# EAGLE board weather-bit-Panel_v12 (EAGLE 9.5.2), part 1 of 2
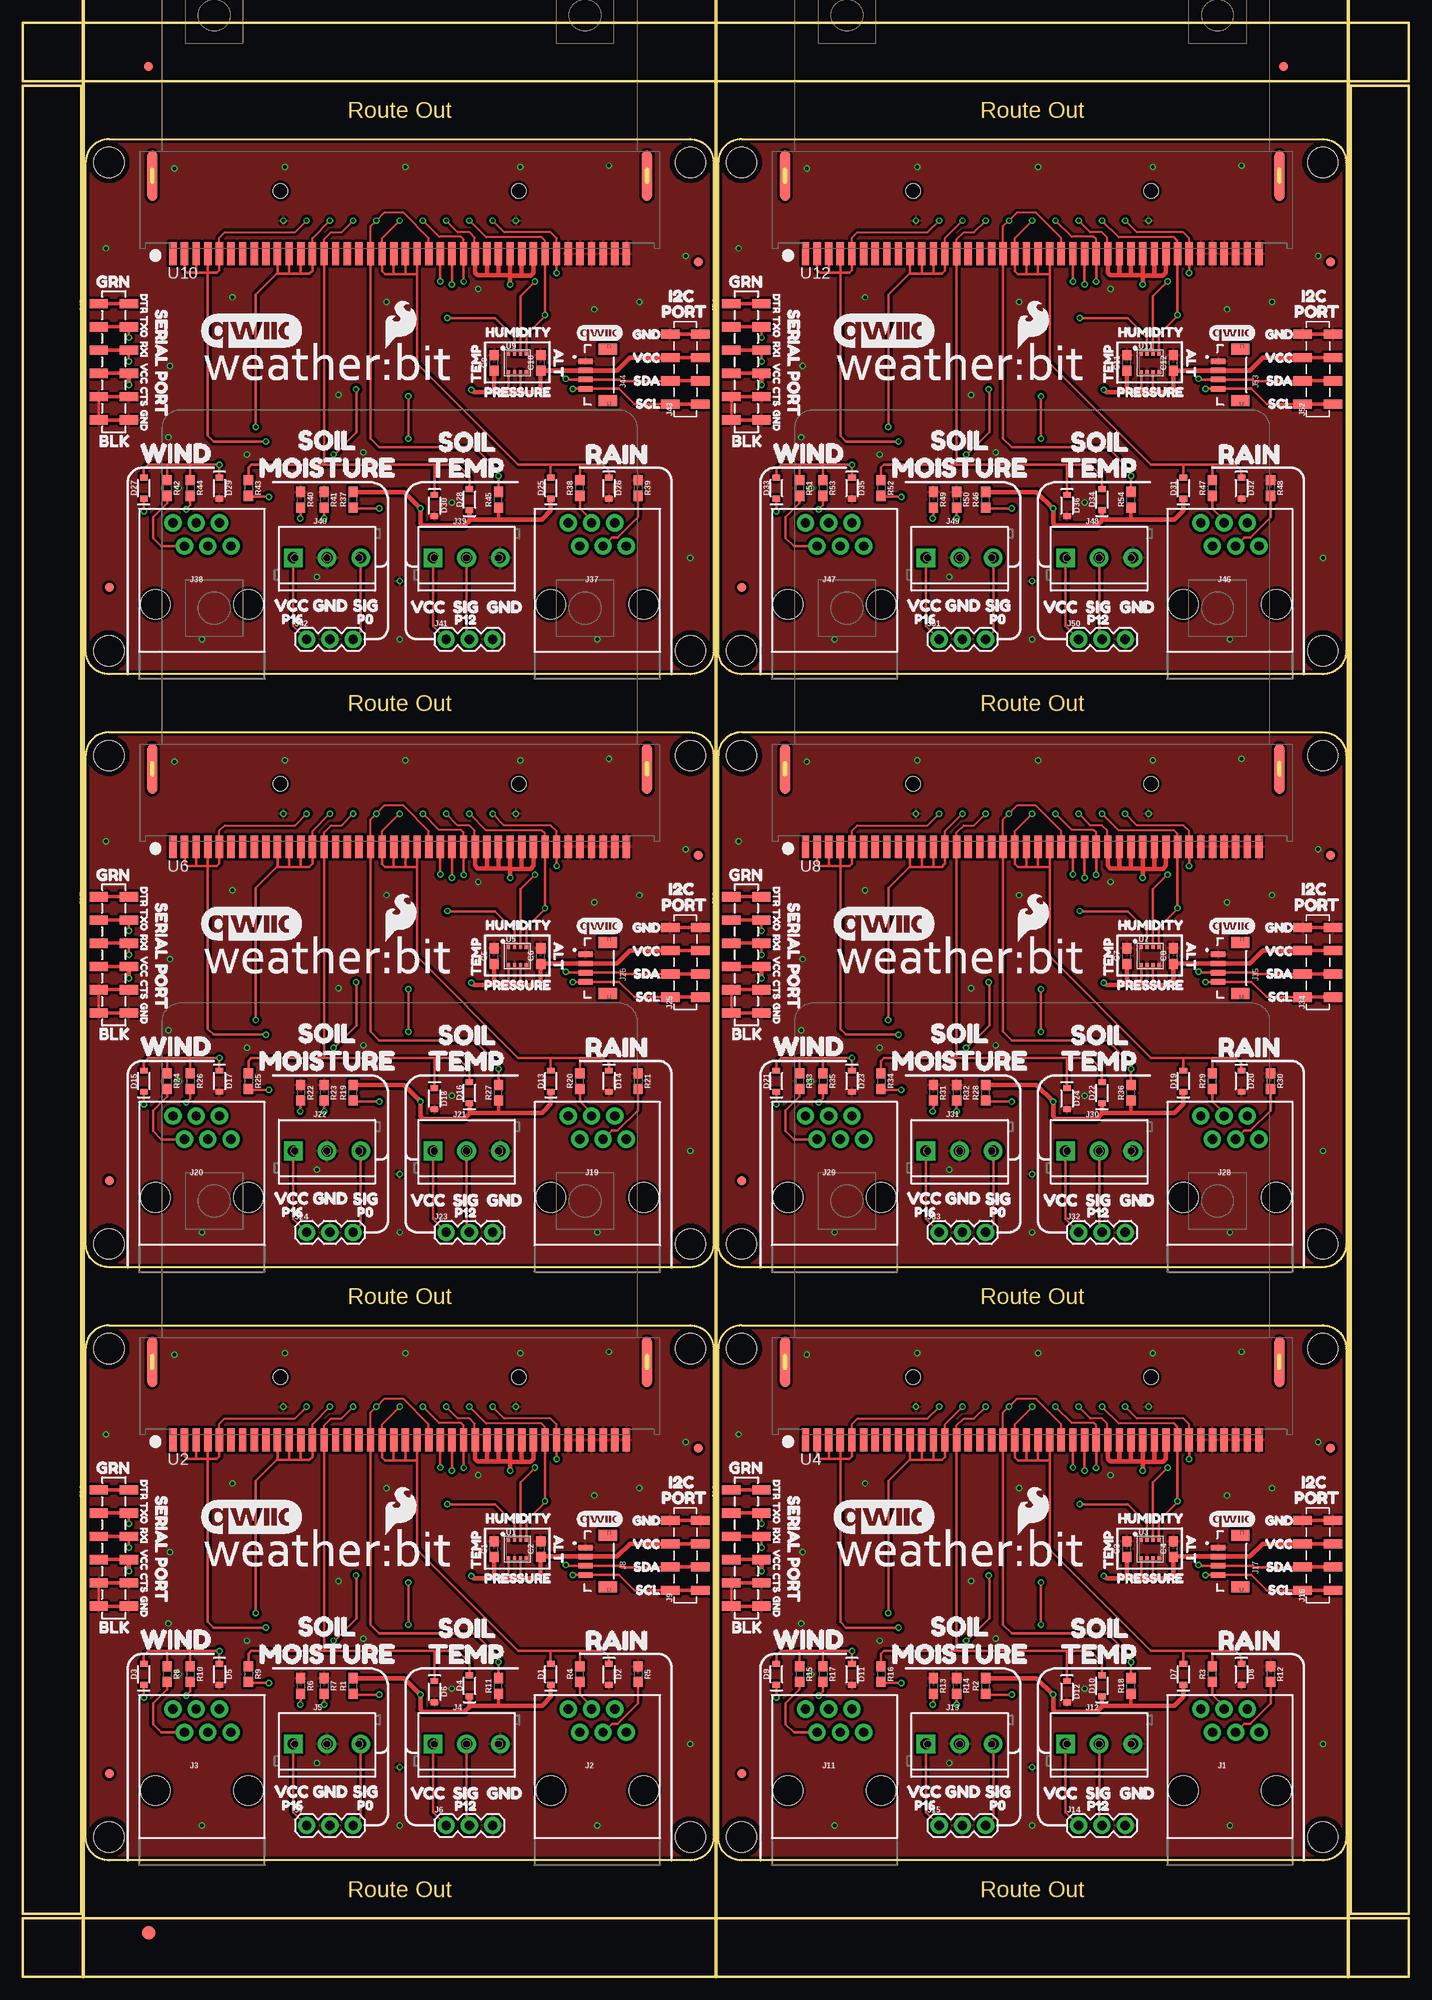
[diagram p0: board, top side]
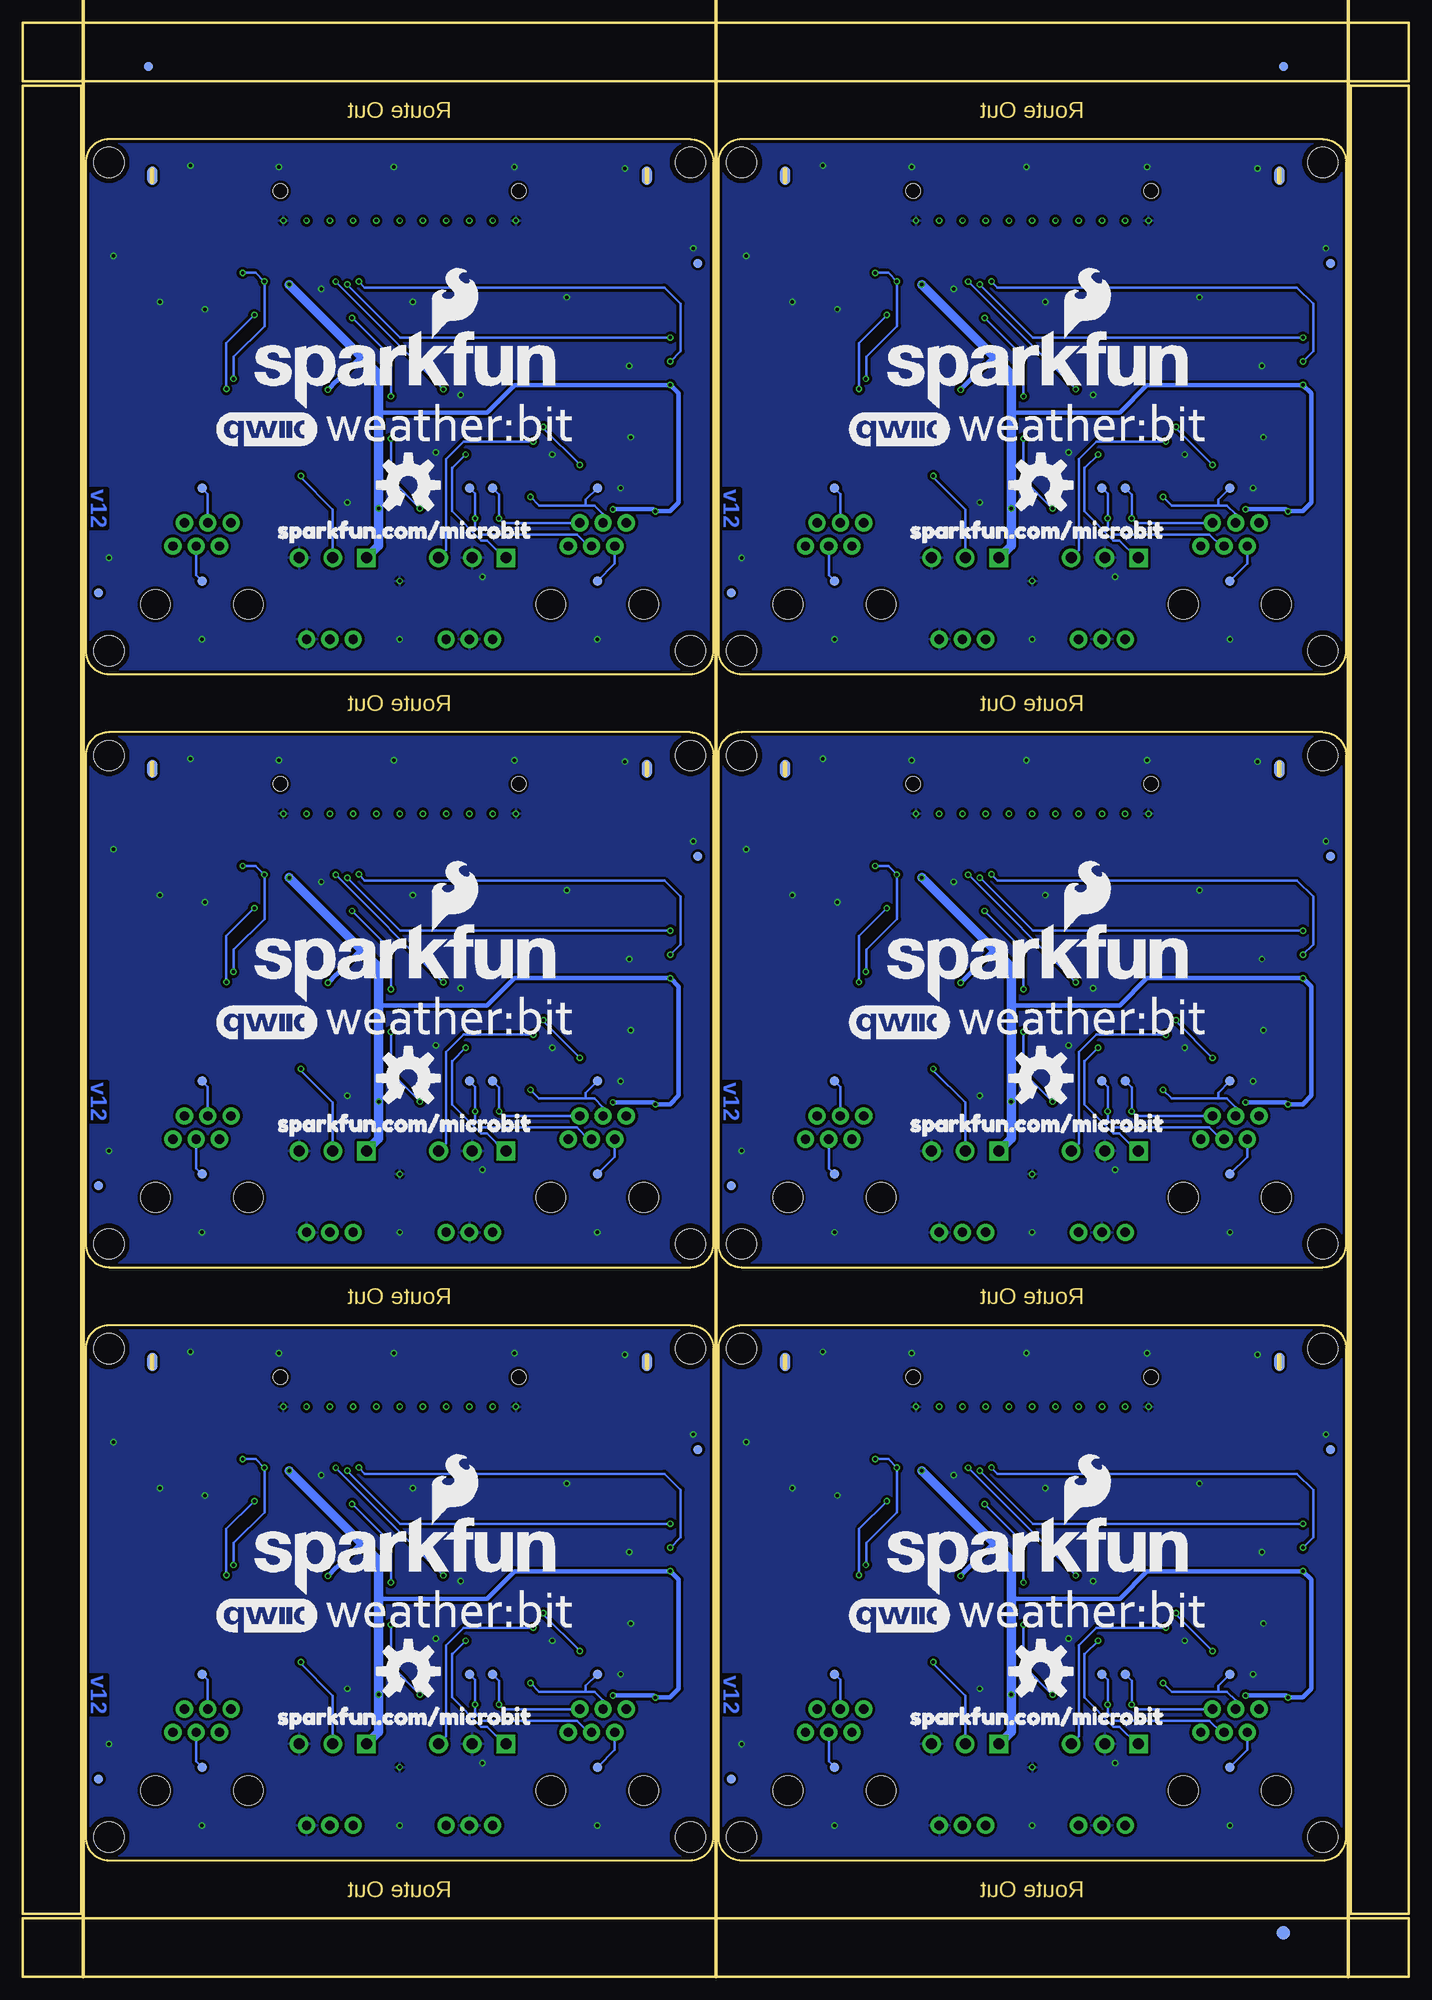
[diagram p1: board, bottom side, seen from below]

Size 151.38 x 213.36 mm. Coordinates in mm from the lower left corner, seen from the top.
Outline: 9.4,71.12 72.9,71.12 arc-90 75.44,68.58 75.44,15.24 arc-90 72.9,12.7 9.4,12.7 arc-90 6.86,15.24 6.86,68.58 arc-90 9.4,71.12
Outline: 78.49,71.12 141.99,71.12 arc-90 144.53,68.58 144.53,15.24 arc-90 141.99,12.7 78.49,12.7 arc-90 75.95,15.24 75.95,68.58 arc-90 78.49,71.12
Outline: 9.4,135.89 72.9,135.89 arc-90 75.44,133.35 75.44,80.01 arc-90 72.9,77.47 9.4,77.47 arc-90 6.86,80.01 6.86,133.35 arc-90 9.4,135.89
Outline: 78.49,135.89 141.99,135.89 arc-90 144.53,133.35 144.53,80.01 arc-90 141.99,77.47 78.49,77.47 arc-90 75.95,80.01 75.95,133.35 arc-90 78.49,135.89
Outline: 9.4,200.66 72.9,200.66 arc-90 75.44,198.12 75.44,144.78 arc-90 72.9,142.24 9.4,142.24 arc-90 6.86,144.78 6.86,198.12 arc-90 9.4,200.66
Outline: 78.49,200.66 141.99,200.66 arc-90 144.53,198.12 144.53,144.78 arc-90 141.99,142.24 78.49,142.24 arc-90 75.95,144.78 75.95,198.12 arc-90 78.49,200.66
Outline: 0,6.35 151.38,6.35 151.38,0 0,0 0,6.35
Outline: 145.03,206.5 151.38,206.5 151.38,6.86 145.03,6.86 145.03,206.5
Outline: 0,213.36 151.38,213.36 151.38,207.01 0,207.01 0,213.36
Outline: 0,206.5 6.35,206.5 6.35,6.86 0,6.86 0,206.5
Copper layers (1*16): Top 0.035mm / dielectric 1.5mm / Bottom 0.035mm
Design rules "SparkFun-2-layer-PCBWay-LIMIT": minimum track width 6mil, minimum drill 0.3mm, track to track 6mil, track to pad 6mil, pad to pad 6mil, via to via 6mil, smd to smd 6mil, copper to edge 6mil, drill to drill 6mil, minimum pad ring 6mil, minimum via ring 6mil, stop-mask expansion 4mil, vias tented up to drill 25mil, thermal gap 10mil
Milling: 3 lines

## Footprints (pad centres in the part's own frame; a part is rotated, then mirrored left to right if it is on the bottom)
0603 = smd 1.1 x 1: 1 -0.85,0; 2 0.85,0
SOD-323 = smd 0.63 x 0.83: A 1.15,0; C -1.15,0
FIDUCIAL-1X2 = smd 1 x 1: 1 0,0
FIDUCIAL-1.5X3 = smd 1.5 x 1.5: 1 0,0
STAND-OFF = hole 3.302: 0,0
RJ11-6 = drill 1.016 pad 1.88: 1 -3.175,8.89; 2 -1.905,6.35; 3 -0.635,8.89; 4 0.635,6.35; 5 1.905,8.89; 6 3.175,6.35 | hole 3.251: -5.08,0; 5.08,0
SCREWTERMINAL-3.5MM-3_LOCK.007S = drill 1.2 pad 2.032 square: 1 -0.178,0 | drill 1.2 pad 2.032: 2 3.5,0; 3 7.178,0
1X03 = drill 1.016 pad 1.88: 1 0,0; 2 2.54,0; 3 5.08,0
JST04_1MM_VERT = smd 0.6 x 1.55: 1 -1.478,0.775; 2 -0.478,0.775; 3 0.522,0.775; 4 1.522,0.775 | smd 1.2 x 2: NC1 -2.778,3.2; NC2 2.822,3.2
1X04_SMD_VERTICAL_COMBO = smd 1 x 2: 1 0,-1.65; 1-2 0,1.65; 2 2.54,1.65; 2-2 2.54,-1.65; 3 5.08,-1.65; 3-2 5.08,1.65; 4 7.62,1.65; 4-2 7.62,-1.65
6_PIN_SERIAL_TARGET_SIDE_VERT_SMT = smd 1 x 2: 1 0,-1.65; 1-2 0,1.65; 2 2.54,1.65; 2-2 2.54,-1.65; 3 5.08,-1.65; 3-2 5.08,1.65; 4 7.62,1.65; 4-2 7.62,-1.65; 5 10.16,-1.65; 5-2 10.16,1.65; 6 12.7,1.65; 6-2 12.7,-1.65
TP_15TH = drill 0.381 pad 0.61: P$1 0,0
PAD.03X.04 = smd 1.016 x 1.016: P$1 0,0
LGA-8-2.5X2.5 = smd 0.35 x 0.5: 1 -0.975,1.025; 2 -0.325,1.025; 3 0.325,1.025; 4 0.975,1.025; 5 0.975,-1.025; 6 0.325,-1.025; 7 -0.325,-1.025; 8 -0.975,-1.025
MICRO:BIT-RA_SMD = smd 0.8 x 2.5: P$1 -24.765,-6.15; P$2 -23.495,-6.15; P$3 -22.225,-6.15; P$4 -20.955,-6.15; P$5 -19.685,-6.15; P$6 -18.415,-6.15; P$7 -17.145,-6.15; P$8 -15.875,-6.15; P$9 -14.605,-6.15; P$10 -13.335,-6.15; P$11 -12.065,-6.15; P$12 -10.795,-6.15; P$13 -9.525,-6.15; P$14 -8.255,-6.15; P$15 -6.985,-6.15; P$16 -5.715,-6.15; P$17 -4.445,-6.15; P$18 -3.175,-6.15; P$19 -1.905,-6.15; P$20 -0.635,-6.15; P$21 0.635,-6.15; P$22 1.905,-6.15; P$23 3.175,-6.15; P$24 4.445,-6.15; P$25 5.715,-6.15; P$26 6.985,-6.15; P$27 8.255,-6.15; P$28 9.525,-6.15; P$29 10.795,-6.15; P$30 12.065,-6.15; P$31 13.335,-6.15; P$32 14.605,-6.15; P$33 15.875,-6.15; P$34 17.145,-6.15; P$35 18.415,-6.15; P$36 19.685,-6.15; P$37 20.955,-6.15; P$38 22.225,-6.15; P$39 23.495,-6.15; P$40 24.765,-6.15 | smd 1.1 x 5.5: P$42 -27,2.36; P$43 27,2.36 | smd 1.1 x 2 bottom: P$44 -27,2.36; P$45 27,2.36 | hole 1.6: 13,0.7; -13,0.7

## Placement (x,y rotation side)
C1  0.1uF  [0603]  51.48,46.69 90 top
C2  0.1uF  [0603]  56.56,46.69 90 top
C3  0.1uF  [0603]  120.57,46.69 90 top
C4  0.1uF  [0603]  125.65,46.69 90 top
C5  0.1uF  [0603]  51.48,111.46 90 top
C6  0.1uF  [0603]  56.56,111.46 90 top
C7  0.1uF  [0603]  120.57,111.46 90 top
C8  0.1uF  [0603]  125.65,111.46 90 top
C9  0.1uF  [0603]  51.48,176.23 90 top
C10  0.1uF  [0603]  56.56,176.23 90 top
C11  0.1uF  [0603]  120.57,176.23 90 top
C12  0.1uF  [0603]  125.65,176.23 90 top
D1  250mA/100V  [SOD-323]  57.66,33.02 90 top
D2  250mA/100V  [SOD-323]  64.01,33.02 270 top
D3  250mA/100V  [SOD-323]  13.21,33.02 90 top
D4  250mA/100V  [SOD-323]  48.77,31.75 90 top
D5  250mA/100V  [SOD-323]  21.46,33.02 270 top
D6  250mA/100V  [SOD-323]  44.96,31.11 270 top
D7  250mA/100V  [SOD-323]  126.75,33.02 90 top
D8  250mA/100V  [SOD-323]  133.1,33.02 270 top
D9  250mA/100V  [SOD-323]  82.3,33.02 90 top
D10  250mA/100V  [SOD-323]  117.86,31.75 90 top
D11  250mA/100V  [SOD-323]  90.55,33.02 270 top
D12  250mA/100V  [SOD-323]  114.05,31.11 270 top
D13  250mA/100V  [SOD-323]  57.66,97.79 90 top
D14  250mA/100V  [SOD-323]  64.01,97.79 270 top
D15  250mA/100V  [SOD-323]  13.21,97.79 90 top
D16  250mA/100V  [SOD-323]  48.77,96.52 90 top
D17  250mA/100V  [SOD-323]  21.46,97.79 270 top
D18  250mA/100V  [SOD-323]  44.96,95.89 270 top
D19  250mA/100V  [SOD-323]  126.75,97.79 90 top
D20  250mA/100V  [SOD-323]  133.1,97.79 270 top
D21  250mA/100V  [SOD-323]  82.3,97.79 90 top
D22  250mA/100V  [SOD-323]  117.86,96.52 90 top
D23  250mA/100V  [SOD-323]  90.55,97.79 270 top
D24  250mA/100V  [SOD-323]  114.05,95.89 270 top
D25  250mA/100V  [SOD-323]  57.66,162.56 90 top
D26  250mA/100V  [SOD-323]  64.01,162.56 270 top
D27  250mA/100V  [SOD-323]  13.21,162.56 90 top
D28  250mA/100V  [SOD-323]  48.77,161.29 90 top
D29  250mA/100V  [SOD-323]  21.46,162.56 270 top
D30  250mA/100V  [SOD-323]  44.96,160.66 270 top
D31  250mA/100V  [SOD-323]  126.75,162.56 90 top
D32  250mA/100V  [SOD-323]  133.1,162.56 270 top
D33  250mA/100V  [SOD-323]  82.3,162.56 90 top
D34  250mA/100V  [SOD-323]  117.86,161.29 90 top
D35  250mA/100V  [SOD-323]  90.55,162.56 270 top
D36  250mA/100V  [SOD-323]  114.05,160.66 270 top
E$1  [FIDUCIAL-1X2]  13.72,208.6 0 top
E$2  [FIDUCIAL-1X2]  13.72,208.6 0 bottom
E$3  [FIDUCIAL-1X2]  137.67,208.6 0 top
E$4  [FIDUCIAL-1X2]  137.67,208.6 0 bottom
E$5  [FIDUCIAL-1.5X3]  13.72,4.76 0 top
E$6  [FIDUCIAL-1.5X3]  13.72,4.76 0 bottom
FD1  FIDUCIAL1X2  [FIDUCIAL-1X2]  9.43,22.16 0 top
FD2  FIDUCIAL1X2  [FIDUCIAL-1X2]  73.76,57.69 0 top
FD3  FIDUCIAL1X2  [FIDUCIAL-1X2]  8.57,57.56 0 bottom
FD4  FIDUCIAL1X2  [FIDUCIAL-1X2]  74.04,21.59 0 bottom
FD5  FIDUCIAL1X2  [FIDUCIAL-1X2]  78.52,22.16 0 top
FD6  FIDUCIAL1X2  [FIDUCIAL-1X2]  142.84,57.69 0 top
FD7  FIDUCIAL1X2  [FIDUCIAL-1X2]  77.66,57.56 0 bottom
FD8  FIDUCIAL1X2  [FIDUCIAL-1X2]  143.13,21.59 0 bottom
FD9  FIDUCIAL1X2  [FIDUCIAL-1X2]  9.43,86.93 0 top
FD10  FIDUCIAL1X2  [FIDUCIAL-1X2]  73.76,122.46 0 top
FD11  FIDUCIAL1X2  [FIDUCIAL-1X2]  8.57,122.33 0 bottom
FD12  FIDUCIAL1X2  [FIDUCIAL-1X2]  74.04,86.36 0 bottom
FD13  FIDUCIAL1X2  [FIDUCIAL-1X2]  78.52,86.93 0 top
FD14  FIDUCIAL1X2  [FIDUCIAL-1X2]  142.84,122.46 0 top
FD15  FIDUCIAL1X2  [FIDUCIAL-1X2]  77.66,122.33 0 bottom
FD16  FIDUCIAL1X2  [FIDUCIAL-1X2]  143.13,86.36 0 bottom
FD17  FIDUCIAL1X2  [FIDUCIAL-1X2]  9.43,151.7 0 top
FD18  FIDUCIAL1X2  [FIDUCIAL-1X2]  73.76,187.23 0 top
FD19  FIDUCIAL1X2  [FIDUCIAL-1X2]  8.57,187.1 0 bottom
FD20  FIDUCIAL1X2  [FIDUCIAL-1X2]  74.04,151.13 0 bottom
FD21  FIDUCIAL1X2  [FIDUCIAL-1X2]  78.52,151.7 0 top
FD22  FIDUCIAL1X2  [FIDUCIAL-1X2]  142.84,187.23 0 top
FD23  FIDUCIAL1X2  [FIDUCIAL-1X2]  77.66,187.1 0 bottom
FD24  FIDUCIAL1X2  [FIDUCIAL-1X2]  143.13,151.13 0 bottom
H1  STAND-OFF  [STAND-OFF]  9.4,68.58 0 top
H2  STAND-OFF  [STAND-OFF]  72.9,68.58 0 top
H3  STAND-OFF  [STAND-OFF]  9.4,15.24 0 top
H4  STAND-OFF  [STAND-OFF]  72.9,15.24 0 top
H5  STAND-OFF  [STAND-OFF]  78.49,68.58 0 top
H6  STAND-OFF  [STAND-OFF]  141.99,68.58 0 top
H7  STAND-OFF  [STAND-OFF]  78.49,15.24 0 top
H8  STAND-OFF  [STAND-OFF]  141.99,15.24 0 top
H9  STAND-OFF  [STAND-OFF]  9.4,133.35 0 top
H10  STAND-OFF  [STAND-OFF]  72.9,133.35 0 top
H11  STAND-OFF  [STAND-OFF]  9.4,80.01 0 top
H12  STAND-OFF  [STAND-OFF]  72.9,80.01 0 top
H13  STAND-OFF  [STAND-OFF]  78.49,133.35 0 top
H14  STAND-OFF  [STAND-OFF]  141.99,133.35 0 top
H15  STAND-OFF  [STAND-OFF]  78.49,80.01 0 top
H16  STAND-OFF  [STAND-OFF]  141.99,80.01 0 top
H17  STAND-OFF  [STAND-OFF]  9.4,198.12 0 top
H18  STAND-OFF  [STAND-OFF]  72.9,198.12 0 top
H19  STAND-OFF  [STAND-OFF]  9.4,144.78 0 top
H20  STAND-OFF  [STAND-OFF]  72.9,144.78 0 top
H21  STAND-OFF  [STAND-OFF]  78.49,198.12 0 top
H22  STAND-OFF  [STAND-OFF]  141.99,198.12 0 top
H23  STAND-OFF  [STAND-OFF]  78.49,144.78 0 top
H24  STAND-OFF  [STAND-OFF]  141.99,144.78 0 top
J1  RJ11  [RJ11-6]  131.83,20.32 0 top
J2  RJ11  [RJ11-6]  62.74,20.32 0 top
J3  RJ11  [RJ11-6]  19.56,20.32 0 top
J4  [SCREWTERMINAL-3.5MM-3_LOCK.007S]  44.96,25.4 0 top
J5  [SCREWTERMINAL-3.5MM-3_LOCK.007S]  29.72,25.4 0 top
J6  [1X03]  46.23,16.51 0 top
J7  [1X03]  30.99,16.51 0 top
J8  Qwiic (vertical)  [JST04_1MM_VERT]  60.68,45.39 270 top
J9  1X04_SMD_STRAIGHT_COMBO  [1X04_SMD_VERTICAL_COMBO]  72.34,42.19 90 top
J10  SMD  [6_PIN_SERIAL_TARGET_SIDE_VERT_SMT]  9.93,53.16 270 top
J11  RJ11  [RJ11-6]  88.65,20.32 0 top
J12  [SCREWTERMINAL-3.5MM-3_LOCK.007S]  114.05,25.4 0 top
J13  [SCREWTERMINAL-3.5MM-3_LOCK.007S]  98.81,25.4 0 top
J14  [1X03]  115.32,16.51 0 top
J15  [1X03]  100.08,16.51 0 top
J16  1X04_SMD_STRAIGHT_COMBO  [1X04_SMD_VERTICAL_COMBO]  141.43,42.19 90 top
J17  Qwiic (vertical)  [JST04_1MM_VERT]  129.77,45.39 270 top
J18  SMD  [6_PIN_SERIAL_TARGET_SIDE_VERT_SMT]  79.02,53.16 270 top
J19  RJ11  [RJ11-6]  62.74,85.09 0 top
J20  RJ11  [RJ11-6]  19.56,85.09 0 top
J21  [SCREWTERMINAL-3.5MM-3_LOCK.007S]  44.96,90.17 0 top
J22  [SCREWTERMINAL-3.5MM-3_LOCK.007S]  29.72,90.17 0 top
J23  [1X03]  46.23,81.28 0 top
J24  [1X03]  30.99,81.28 0 top
J25  1X04_SMD_STRAIGHT_COMBO  [1X04_SMD_VERTICAL_COMBO]  72.34,106.96 90 top
J26  Qwiic (vertical)  [JST04_1MM_VERT]  60.68,110.16 270 top
J27  SMD  [6_PIN_SERIAL_TARGET_SIDE_VERT_SMT]  9.93,117.93 270 top
J28  RJ11  [RJ11-6]  131.83,85.09 0 top
J29  RJ11  [RJ11-6]  88.65,85.09 0 top
J30  [SCREWTERMINAL-3.5MM-3_LOCK.007S]  114.05,90.17 0 top
J31  [SCREWTERMINAL-3.5MM-3_LOCK.007S]  98.81,90.17 0 top
J32  [1X03]  115.32,81.28 0 top
J33  [1X03]  100.08,81.28 0 top
J34  1X04_SMD_STRAIGHT_COMBO  [1X04_SMD_VERTICAL_COMBO]  141.43,106.96 90 top
J35  Qwiic (vertical)  [JST04_1MM_VERT]  129.77,110.16 270 top
J36  SMD  [6_PIN_SERIAL_TARGET_SIDE_VERT_SMT]  79.02,117.93 270 top
J37  RJ11  [RJ11-6]  62.74,149.86 0 top
J38  RJ11  [RJ11-6]  19.56,149.86 0 top
J39  [SCREWTERMINAL-3.5MM-3_LOCK.007S]  44.96,154.94 0 top
J40  [SCREWTERMINAL-3.5MM-3_LOCK.007S]  29.72,154.94 0 top
J41  [1X03]  46.23,146.05 0 top
J42  [1X03]  30.99,146.05 0 top
J43  1X04_SMD_STRAIGHT_COMBO  [1X04_SMD_VERTICAL_COMBO]  72.34,171.73 90 top
J44  Qwiic (vertical)  [JST04_1MM_VERT]  60.68,174.93 270 top
J45  SMD  [6_PIN_SERIAL_TARGET_SIDE_VERT_SMT]  9.93,182.7 270 top
J46  RJ11  [RJ11-6]  131.83,149.86 0 top
J47  RJ11  [RJ11-6]  88.65,149.86 0 top
J48  [SCREWTERMINAL-3.5MM-3_LOCK.007S]  114.05,154.94 0 top
J49  [SCREWTERMINAL-3.5MM-3_LOCK.007S]  98.81,154.94 0 top
J50  [1X03]  115.32,146.05 0 top
J51  [1X03]  100.08,146.05 0 top
J52  1X04_SMD_STRAIGHT_COMBO  [1X04_SMD_VERTICAL_COMBO]  141.43,171.73 90 top
J53  Qwiic (vertical)  [JST04_1MM_VERT]  129.77,174.93 270 top
J54  SMD  [6_PIN_SERIAL_TARGET_SIDE_VERT_SMT]  79.02,182.7 270 top
LOGO1  OSHW-LOGOL  [OSHW-LOGO-L]  109.28,33.34 0 bottom
LOGO2  SFE_LOGO_NAME_FLAME.3_INCH  [SFE_LOGO_NAME_FLAME_.3]  57.5,41.59 0 bottom
LOGO3  OSHW-LOGOL  [OSHW-LOGO-L]  40.2,33.34 0 bottom
LOGO4  SFE_LOGO_NAME_FLAME.3_INCH  [SFE_LOGO_NAME_FLAME_.3]  126.59,41.59 0 bottom
LOGO5  OSHW-LOGOL  [OSHW-LOGO-L]  40.2,98.11 0 bottom
LOGO6  SFE_LOGO_NAME_FLAME.3_INCH  [SFE_LOGO_NAME_FLAME_.3]  57.5,106.36 0 bottom
LOGO7  OSHW-LOGOL  [OSHW-LOGO-L]  109.28,98.11 0 bottom
LOGO8  SFE_LOGO_NAME_FLAME.3_INCH  [SFE_LOGO_NAME_FLAME_.3]  126.59,106.36 0 bottom
LOGO9  OSHW-LOGOL  [OSHW-LOGO-L]  40.2,162.88 0 bottom
LOGO10  SFE_LOGO_NAME_FLAME.3_INCH  [SFE_LOGO_NAME_FLAME_.3]  57.5,171.13 0 bottom
LOGO11  OSHW-LOGOL  [OSHW-LOGO-L]  109.28,162.88 0 bottom
LOGO12  SFE_LOGO_NAME_FLAME.3_INCH  [SFE_LOGO_NAME_FLAME_.3]  126.59,171.13 0 bottom
R1  4.7k  [0603]  36.07,31.75 90 top
R2  4.7k  [0603]  105.16,31.75 90 top
R3  1k  [0603]  129.92,33.02 90 top
R4  1k  [0603]  60.83,33.02 90 top
R5  1k  [0603]  67.18,33.02 270 top
R6  1k  [0603]  30.35,31.75 270 top
R7  1k  [0603]  32.89,31.75 270 top
R8  1k  [0603]  15.75,33.02 270 top
R9  1k  [0603]  24.64,33.02 270 top
R10  4.7k  [0603]  18.29,33.02 270 top
R11  4.7k  [0603]  51.94,31.75 90 top
R12  1k  [0603]  136.27,33.02 270 top
R13  1k  [0603]  99.44,31.75 270 top
R14  1k  [0603]  101.98,31.75 270 top
R15  1k  [0603]  84.84,33.02 270 top
R16  1k  [0603]  93.73,33.02 270 top
R17  4.7k  [0603]  87.38,33.02 270 top
R18  4.7k  [0603]  121.03,31.75 90 top
R19  4.7k  [0603]  36.07,96.52 90 top
R20  1k  [0603]  60.83,97.79 90 top
R21  1k  [0603]  67.18,97.79 270 top
R22  1k  [0603]  30.35,96.52 270 top
R23  1k  [0603]  32.89,96.52 270 top
R24  1k  [0603]  15.75,97.79 270 top
R25  1k  [0603]  24.64,97.79 270 top
R26  4.7k  [0603]  18.29,97.79 270 top
R27  4.7k  [0603]  51.94,96.52 90 top
R28  4.7k  [0603]  105.16,96.52 90 top
R29  1k  [0603]  129.92,97.79 90 top
R30  1k  [0603]  136.27,97.79 270 top
R31  1k  [0603]  99.44,96.52 270 top
R32  1k  [0603]  101.98,96.52 270 top
R33  1k  [0603]  84.84,97.79 270 top
R34  1k  [0603]  93.73,97.79 270 top
R35  4.7k  [0603]  87.38,97.79 270 top
R36  4.7k  [0603]  121.03,96.52 90 top
R37  4.7k  [0603]  36.07,161.29 90 top
R38  1k  [0603]  60.83,162.56 90 top
R39  1k  [0603]  67.18,162.56 270 top
R40  1k  [0603]  30.35,161.29 270 top
R41  1k  [0603]  32.89,161.29 270 top
R42  1k  [0603]  15.75,162.56 270 top
R43  1k  [0603]  24.64,162.56 270 top
R44  4.7k  [0603]  18.29,162.56 270 top
R45  4.7k  [0603]  51.94,161.29 90 top
R46  4.7k  [0603]  105.16,161.29 90 top
R47  1k  [0603]  129.92,162.56 90 top
R48  1k  [0603]  136.27,162.56 270 top
R49  1k  [0603]  99.44,161.29 270 top
R50  1k  [0603]  101.98,161.29 270 top
R51  1k  [0603]  84.84,162.56 270 top
R52  1k  [0603]  93.73,162.56 270 top
R53  4.7k  [0603]  87.38,162.56 270 top
R54  4.7k  [0603]  121.03,161.29 90 top
TP1  [TP_15TH]  46.23,62.23 90 top
TP2  [TP_15TH]  53.85,62.23 90 top
TP3  [TP_15TH]  51.31,62.23 90 top
TP4  [TP_15TH]  48.77,62.23 90 top
TP5  [TP_15TH]  43.69,62.23 90 top
TP6  [PAD.03X.04]  62.74,33.02 0 bottom
TP7  [PAD.03X.04]  62.74,22.86 0 bottom
TP8  [TP_15TH]  41.15,62.23 90 top
TP9  [TP_15TH]  38.61,62.23 90 top
TP10  [PAD.03X.04]  19.56,22.86 0 bottom
TP11  [PAD.03X.04]  19.56,33.02 0 bottom
TP12  [PAD.03X.04]  33.53,33.02 0 bottom
TP13  [TP_15TH]  36.07,62.23 90 top
TP14  [TP_15TH]  33.53,62.23 90 top
TP15  [PAD.03X.04]  30.99,33.02 0 bottom
TP16  [TP_15TH]  28.45,62.23 0 top
TP17  [TP_15TH]  41.15,22.86 0 top
TP18  [TP_15TH]  115.32,62.23 90 top
TP19  [TP_15TH]  30.99,62.23 90 top
TP20  [TP_15TH]  122.94,62.23 90 top
TP21  [TP_15TH]  120.4,62.23 90 top
TP22  [TP_15TH]  117.86,62.23 90 top
TP23  [TP_15TH]  112.78,62.23 90 top
TP24  [TP_15TH]  110.24,62.23 90 top
TP25  [TP_15TH]  107.7,62.23 90 top
TP26  [TP_15TH]  105.16,62.23 90 top
TP27  [TP_15TH]  102.62,62.23 90 top
TP28  [TP_15TH]  100.08,62.23 90 top
TP29  [PAD.03X.04]  131.83,33.02 0 bottom
TP30  [PAD.03X.04]  131.83,22.86 0 bottom
TP31  [PAD.03X.04]  88.65,22.86 0 bottom
TP32  [PAD.03X.04]  88.65,33.02 0 bottom
TP33  [PAD.03X.04]  102.62,33.02 0 bottom
TP34  [PAD.03X.04]  100.08,33.02 0 bottom
TP35  [TP_15TH]  97.54,62.23 0 top
TP36  [TP_15TH]  110.24,22.86 0 top
TP37  [TP_15TH]  46.23,127 90 top
TP38  [TP_15TH]  53.85,127 90 top
TP39  [TP_15TH]  51.31,127 90 top
TP40  [TP_15TH]  48.77,127 90 top
TP41  [TP_15TH]  43.69,127 90 top
TP42  [TP_15TH]  41.15,127 90 top
TP43  [TP_15TH]  38.61,127 90 top
TP44  [TP_15TH]  36.07,127 90 top
TP45  [TP_15TH]  33.53,127 90 top
TP46  [TP_15TH]  30.99,127 90 top
TP47  [PAD.03X.04]  62.74,97.79 0 bottom
TP48  [PAD.03X.04]  62.74,87.63 0 bottom
TP49  [PAD.03X.04]  19.56,87.63 0 bottom
TP50  [PAD.03X.04]  19.56,97.79 0 bottom
TP51  [PAD.03X.04]  33.53,97.79 0 bottom
TP52  [PAD.03X.04]  30.99,97.79 0 bottom
TP53  [TP_15TH]  28.45,127 0 top
TP54  [TP_15TH]  41.15,87.63 0 top
TP55  [TP_15TH]  115.32,127 90 top
TP56  [TP_15TH]  122.94,127 90 top
TP57  [TP_15TH]  120.4,127 90 top
TP58  [TP_15TH]  117.86,127 90 top
TP59  [TP_15TH]  112.78,127 90 top
TP60  [TP_15TH]  110.24,127 90 top
TP61  [TP_15TH]  107.7,127 90 top
TP62  [TP_15TH]  105.16,127 90 top
TP63  [TP_15TH]  102.62,127 90 top
TP64  [TP_15TH]  100.08,127 90 top
TP65  [PAD.03X.04]  131.83,97.79 0 bottom
TP66  [PAD.03X.04]  131.83,87.63 0 bottom
TP67  [PAD.03X.04]  88.65,87.63 0 bottom
TP68  [PAD.03X.04]  88.65,97.79 0 bottom
TP69  [PAD.03X.04]  102.62,97.79 0 bottom
TP70  [PAD.03X.04]  100.08,97.79 0 bottom
TP71  [TP_15TH]  97.54,127 0 top
TP72  [TP_15TH]  110.24,87.63 0 top
TP73  [TP_15TH]  46.23,191.77 90 top
TP74  [TP_15TH]  53.85,191.77 90 top
TP75  [TP_15TH]  51.31,191.77 90 top
TP76  [TP_15TH]  48.77,191.77 90 top
TP77  [TP_15TH]  43.69,191.77 90 top
TP78  [TP_15TH]  41.15,191.77 90 top
TP79  [TP_15TH]  38.61,191.77 90 top
TP80  [TP_15TH]  36.07,191.77 90 top
TP81  [TP_15TH]  33.53,191.77 90 top
TP82  [TP_15TH]  30.99,191.77 90 top
TP83  [PAD.03X.04]  62.74,162.56 0 bottom
TP84  [PAD.03X.04]  62.74,152.4 0 bottom
TP85  [PAD.03X.04]  19.56,152.4 0 bottom
TP86  [PAD.03X.04]  19.56,162.56 0 bottom
TP87  [PAD.03X.04]  33.53,162.56 0 bottom
TP88  [PAD.03X.04]  30.99,162.56 0 bottom
TP89  [TP_15TH]  28.45,191.77 0 top
TP90  [TP_15TH]  41.15,152.4 0 top
TP91  [TP_15TH]  115.32,191.77 90 top
TP92  [TP_15TH]  122.94,191.77 90 top
TP93  [TP_15TH]  120.4,191.77 90 top
TP94  [TP_15TH]  117.86,191.77 90 top
TP95  [TP_15TH]  112.78,191.77 90 top
TP96  [TP_15TH]  110.24,191.77 90 top
TP97  [TP_15TH]  107.7,191.77 90 top
TP98  [TP_15TH]  105.16,191.77 90 top
TP99  [TP_15TH]  102.62,191.77 90 top
TP100  [TP_15TH]  100.08,191.77 90 top
TP101  [PAD.03X.04]  131.83,162.56 0 bottom
TP102  [PAD.03X.04]  131.83,152.4 0 bottom
TP103  [PAD.03X.04]  88.65,152.4 0 bottom
TP104  [PAD.03X.04]  88.65,162.56 0 bottom
TP105  [PAD.03X.04]  102.62,162.56 0 bottom
TP106  [PAD.03X.04]  100.08,162.56 0 bottom
TP107  [TP_15TH]  97.54,191.77 0 top
TP108  [TP_15TH]  110.24,152.4 0 top
U1  BME280  [LGA-8-2.5X2.5]  54.02,46.69 0 top
U2  micro:bit  [MICRO:BIT-RA_SMD]  41.15,64.77 0 top
U3  BME280  [LGA-8-2.5X2.5]  123.11,46.69 0 top
U4  micro:bit  [MICRO:BIT-RA_SMD]  110.24,64.77 0 top
U5  BME280  [LGA-8-2.5X2.5]  54.02,111.46 0 top
U6  micro:bit  [MICRO:BIT-RA_SMD]  41.15,129.54 0 top
U7  BME280  [LGA-8-2.5X2.5]  123.11,111.46 0 top
U8  micro:bit  [MICRO:BIT-RA_SMD]  110.24,129.54 0 top
U9  BME280  [LGA-8-2.5X2.5]  54.02,176.23 0 top
U10  micro:bit  [MICRO:BIT-RA_SMD]  41.15,194.31 0 top
U11  BME280  [LGA-8-2.5X2.5]  123.11,176.23 0 top
U12  micro:bit  [MICRO:BIT-RA_SMD]  110.24,194.31 0 top
U$1  [SFE_LOGO_FLAME_.2]  39.26,48.05 0 top
U$2  [LOGO-WEATHERBIT]  19.66,44.58 0 top
U$3  [LOGO-WEATHERBIT]  49.3,37.92 0 bottom
U$4  [SFE_LOGO_FLAME_.2]  108.35,48.05 0 top
U$5  [QWIIC_5MM]  62.97,49.99 0 top
U$6  [QWIIC_11MM]  24.99,50.17 0 top
U$7  [QWIIC_11MM]  55.63,39.4 0 bottom
U$8  [I2C1]  69.37,54 0 top
U$9  [PORT2]  68.61,52.3 0 top
U$10  [SERIAL_PORT0]  15.11,53.64 270 top
U$11  [WIND12]  11.05,36.83 0 top
U$12  [SOIL13]  28.22,38.25 0 top
U$13  [SOIL13]  43.51,38.07 0 top
U$14  [MOISTURE14]  23.95,35.26 0 top
U$15  [TEMP15]  42.47,35.23 0 top
U$16  [RAIN16]  59.59,36.73 0 top
U$17  [VCC6]  26.37,20.22 0 top
U$18  [GND7]  30.53,20.22 0 top
U$19  [SIG8]  34.9,20.19 0 top
U$20  [SIG8]  45.85,20.04 0 top
U$21  [VCC6]  41.25,20.04 0 top
U$22  [GND7]  49.56,20.04 0 top
U$23  [P169]  27.36,18.72 0 top
U$24  [P010]  35.59,18.72 0 top
U$25  [P1211]  46.23,18.67 0 top
U$26  [HUMIDITY3]  49.61,50.06 0 top
U$27  [TEMP4]  49.48,43.61 90 top
U$28  [PRESSURE5]  49.48,43.51 0 top
U$29  [GND18]  65.68,49.81 0 top
U$30  [VCC19]  65.71,47.24 0 top
U$31  [SDA20]  65.81,44.75 0 top
U$32  [SCL21]  66.04,42.24 0 top
U$33  [SPARKFUN#COM#MICROBIT17]  56.03,28.42 0 bottom
U$34  [ALT0]  58.5,49.07 270 top
U$35  [LOGO-WEATHERBIT]  88.75,44.58 0 top
U$36  [LOGO-WEATHERBIT]  118.39,37.92 0 bottom
U$37  [QWIIC_5MM]  132.05,49.99 0 top
U$38  [QWIIC_11MM]  94.08,50.17 0 top
U$39  [QWIIC_11MM]  124.71,39.4 0 bottom
U$40  [I2C1]  138.46,54 0 top
U$41  [PORT2]  137.69,52.3 0 top
U$42  [SERIAL_PORT0]  84.2,53.64 270 top
U$43  [WIND12]  80.14,36.83 0 top
U$44  [SOIL13]  97.31,38.25 0 top
U$45  [SOIL13]  112.6,38.07 0 top
U$46  [MOISTURE14]  93.04,35.26 0 top
U$47  [TEMP15]  111.56,35.23 0 top
U$48  [RAIN16]  128.68,36.73 0 top
U$49  [VCC6]  95.45,20.22 0 top
U$50  [GND7]  99.62,20.22 0 top
U$51  [SIG8]  103.99,20.19 0 top
U$52  [SIG8]  114.94,20.04 0 top
U$53  [VCC6]  110.34,20.04 0 top
U$54  [GND7]  118.64,20.04 0 top
U$55  [P169]  96.44,18.72 0 top
U$56  [P010]  104.67,18.72 0 top
U$57  [P1211]  115.32,18.67 0 top
U$58  [HUMIDITY3]  118.69,50.06 0 top
U$59  [TEMP4]  118.57,43.61 90 top
U$60  [PRESSURE5]  118.57,43.51 0 top
U$61  [GND18]  134.77,49.81 0 top
U$62  [VCC19]  134.8,47.24 0 top
U$63  [SDA20]  134.9,44.75 0 top
U$64  [SCL21]  135.13,42.24 0 top
U$65  [SPARKFUN#COM#MICROBIT17]  125.12,28.42 0 bottom
U$66  [ALT0]  127.58,49.07 270 top
U$67  [SFE_LOGO_FLAME_.2]  39.26,112.82 0 top
U$68  [LOGO-WEATHERBIT]  19.66,109.35 0 top
U$69  [LOGO-WEATHERBIT]  49.3,102.69 0 bottom
U$70  [QWIIC_5MM]  62.97,114.76 0 top
U$71  [QWIIC_11MM]  24.99,114.94 0 top
U$72  [QWIIC_11MM]  55.63,104.17 0 bottom
U$73  [I2C1]  69.37,118.77 0 top
U$74  [PORT2]  68.61,117.07 0 top
U$75  [SERIAL_PORT0]  15.11,118.41 270 top
U$76  [WIND12]  11.05,101.6 0 top
U$77  [SOIL13]  28.22,103.02 0 top
U$78  [SOIL13]  43.51,102.84 0 top
U$79  [MOISTURE14]  23.95,100.03 0 top
U$80  [TEMP15]  42.47,100 0 top
U$81  [RAIN16]  59.59,101.5 0 top
U$82  [VCC6]  26.37,84.99 0 top
U$83  [GND7]  30.53,84.99 0 top
U$84  [SIG8]  34.9,84.96 0 top
U$85  [SIG8]  45.85,84.81 0 top
U$86  [VCC6]  41.25,84.81 0 top
U$87  [GND7]  49.56,84.81 0 top
U$88  [P169]  27.36,83.49 0 top
U$89  [P010]  35.59,83.49 0 top
U$90  [P1211]  46.23,83.44 0 top
U$91  [HUMIDITY3]  49.61,114.83 0 top
U$92  [TEMP4]  49.48,108.38 90 top
U$93  [PRESSURE5]  49.48,108.28 0 top
U$94  [GND18]  65.68,114.58 0 top
U$95  [VCC19]  65.71,112.01 0 top
U$96  [SDA20]  65.81,109.52 0 top
U$97  [SCL21]  66.04,107.01 0 top
U$98  [SPARKFUN#COM#MICROBIT17]  56.03,93.19 0 bottom
U$99  [ALT0]  58.5,113.84 270 top
U$100  [SFE_LOGO_FLAME_.2]  108.35,112.82 0 top
U$101  [LOGO-WEATHERBIT]  88.75,109.35 0 top
U$102  [LOGO-WEATHERBIT]  118.39,102.69 0 bottom
U$103  [QWIIC_5MM]  132.05,114.76 0 top
U$104  [QWIIC_11MM]  94.08,114.94 0 top
U$105  [QWIIC_11MM]  124.71,104.17 0 bottom
U$106  [I2C1]  138.46,118.77 0 top
U$107  [PORT2]  137.69,117.07 0 top
U$108  [SERIAL_PORT0]  84.2,118.41 270 top
U$109  [WIND12]  80.14,101.6 0 top
U$110  [SOIL13]  97.31,103.02 0 top
U$111  [SOIL13]  112.6,102.84 0 top
U$112  [MOISTURE14]  93.04,100.03 0 top
U$113  [TEMP15]  111.56,100 0 top
U$114  [RAIN16]  128.68,101.5 0 top
U$115  [VCC6]  95.45,84.99 0 top
U$116  [GND7]  99.62,84.99 0 top
U$117  [SIG8]  103.99,84.96 0 top
U$118  [SIG8]  114.94,84.81 0 top
U$119  [VCC6]  110.34,84.81 0 top
U$120  [GND7]  118.64,84.81 0 top
U$121  [P169]  96.44,83.49 0 top
U$122  [P010]  104.67,83.49 0 top
U$123  [P1211]  115.32,83.44 0 top
U$124  [HUMIDITY3]  118.69,114.83 0 top
U$125  [TEMP4]  118.57,108.38 90 top
U$126  [PRESSURE5]  118.57,108.28 0 top
U$127  [GND18]  134.77,114.58 0 top
U$128  [VCC19]  134.8,112.01 0 top
U$129  [SDA20]  134.9,109.52 0 top
U$130  [SCL21]  135.13,107.01 0 top
U$131  [SPARKFUN#COM#MICROBIT17]  125.12,93.19 0 bottom
U$132  [ALT0]  127.58,113.84 270 top
U$133  [SFE_LOGO_FLAME_.2]  39.26,177.59 0 top
U$134  [LOGO-WEATHERBIT]  19.66,174.12 0 top
U$135  [LOGO-WEATHERBIT]  49.3,167.46 0 bottom
U$136  [QWIIC_5MM]  62.97,179.53 0 top
U$137  [QWIIC_11MM]  24.99,179.7 0 top
U$138  [QWIIC_11MM]  55.63,168.94 0 bottom
U$139  [I2C1]  69.37,183.54 0 top
U$140  [PORT2]  68.61,181.84 0 top
U$141  [SERIAL_PORT0]  15.11,183.18 270 top
U$142  [WIND12]  11.05,166.37 0 top
U$143  [SOIL13]  28.22,167.79 0 top
U$144  [SOIL13]  43.51,167.61 0 top
U$145  [MOISTURE14]  23.95,164.8 0 top
U$146  [TEMP15]  42.47,164.77 0 top
U$147  [RAIN16]  59.59,166.27 0 top
U$148  [VCC6]  26.37,149.76 0 top
U$149  [GND7]  30.53,149.76 0 top
U$150  [SIG8]  34.9,149.73 0 top
U$151  [SIG8]  45.85,149.58 0 top
U$152  [VCC6]  41.25,149.58 0 top
U$153  [GND7]  49.56,149.58 0 top
U$154  [P169]  27.36,148.26 0 top
U$155  [P010]  35.59,148.26 0 top
U$156  [P1211]  46.23,148.21 0 top
U$157  [HUMIDITY3]  49.61,179.6 0 top
U$158  [TEMP4]  49.48,173.15 90 top
U$159  [PRESSURE5]  49.48,173.05 0 top
U$160  [GND18]  65.68,179.35 0 top
U$161  [VCC19]  65.71,176.78 0 top
U$162  [SDA20]  65.81,174.29 0 top
U$163  [SCL21]  66.04,171.78 0 top
U$164  [SPARKFUN#COM#MICROBIT17]  56.03,157.96 0 bottom
U$165  [ALT0]  58.5,178.61 270 top
U$166  [SFE_LOGO_FLAME_.2]  108.35,177.59 0 top
U$167  [LOGO-WEATHERBIT]  88.75,174.12 0 top
U$168  [LOGO-WEATHERBIT]  118.39,167.46 0 bottom
U$169  [QWIIC_5MM]  132.05,179.53 0 top
U$170  [QWIIC_11MM]  94.08,179.7 0 top
U$171  [QWIIC_11MM]  124.71,168.94 0 bottom
U$172  [I2C1]  138.46,183.54 0 top
U$173  [PORT2]  137.69,181.84 0 top
U$174  [SERIAL_PORT0]  84.2,183.18 270 top
U$175  [WIND12]  80.14,166.37 0 top
U$176  [SOIL13]  97.31,167.79 0 top
U$177  [SOIL13]  112.6,167.61 0 top
U$178  [MOISTURE14]  93.04,164.8 0 top
U$179  [TEMP15]  111.56,164.77 0 top
U$180  [RAIN16]  128.68,166.27 0 top
U$181  [VCC6]  95.45,149.76 0 top
U$182  [GND7]  99.62,149.76 0 top
U$183  [SIG8]  103.99,149.73 0 top
U$184  [SIG8]  114.94,149.58 0 top
U$185  [VCC6]  110.34,149.58 0 top
U$186  [GND7]  118.64,149.58 0 top
U$187  [P169]  96.44,148.26 0 top
U$188  [P010]  104.67,148.26 0 top
U$189  [P1211]  115.32,148.21 0 top
U$190  [HUMIDITY3]  118.69,179.6 0 top
U$191  [TEMP4]  118.57,173.15 90 top
U$192  [PRESSURE5]  118.57,173.05 0 top
U$193  [GND18]  134.77,179.35 0 top
U$194  [VCC19]  134.8,176.78 0 top
U$195  [SDA20]  134.9,174.29 0 top
U$196  [SCL21]  135.13,171.78 0 top
U$197  [SPARKFUN#COM#MICROBIT17]  125.12,157.96 0 bottom
U$198  [ALT0]  127.58,178.61 270 top

## Library data of the parts
C1-C12 = SparkFun-Capacitors; PROD_ID: CAP-00810
D1-D36 = SparkFun-DiscreteSemi; PROD_ID: DIO-09646
E$1-E$4 FD1-FD24 LOGO1-LOGO12 U$1 U$4-U$7 U$37-U$39 U$67 U$70-U$72 U$100 U$103-U$105 U$133 U$136-U$138 U$166 U$169-U$171 = SparkFun-Aesthetics
E$5 E$6 = SparkFun-Retired
H1-H24 = SparkFun-Electromechanical
J1-J3 J11 J19 J20 J28 J29 J37 J38 J46 J47 = SparkFun-Connectors; PROD_ID: CONN-08590; SF_ID: PRT-00132
J4 J5 J12 J13 J21 J22 J30 J31 J39 J40 J48 J49 = SparkFun-Connectors; PROD_ID: CONN-08288; SF_ID: PRT-08235
J6 J7 J14 J15 J23 J24 J32 J33 J41 J42 J50 J51 = SparkFun-Connectors; PROD_ID: XXX-00000; VALUE: 455-1750-1-ND
J8 J17 J26 J35 J44 J53 = SparkFun-Connectors; PROD_ID: CONN-14483
J9 J16 J25 J34 J43 J52 = SparkFun-Connectors; PROD_ID: CONN-08511
J10 J18 J27 J36 J45 J54 = SparkFun-Connectors; PROD_ID: CONN-10203
R1 R2 R10 R11 R17-R19 R26-R28 R35-R37 R44-R46 R53 R54 = SparkFun-Resistors; PROD_ID: RES-07857
R3-R9 R12-R16 R20-R25 R29-R34 R38-R43 R47-R52 = SparkFun-Resistors; PROD_ID: RES-07856
TP1-TP108 = SparkFun-Connectors
U1 U3 U5 U7 U9 U11 = SparkFun-Sensors; PROD_ID: IC-13090
U2 U4 U6 U8 U10 U12 = SparkFun-Connectors; PROD_ID: CONN-14679
U$2 U$3 U$35 U$36 U$68 U$69 U$101 U$102 U$134 U$135 U$167 U$168 = Micro_Bit_LOGOS
U$8-U$33 U$40-U$65 U$73-U$98 U$106-U$131 U$139-U$164 U$172-U$197 = buzzard_labels
U$34 U$66 U$99 U$132 U$165 U$198 = buzzard_labels (1)

## Nets
3.3V: C1.1 C2.1 D1.C D3.C D4.C J4.1 J6.1 J8.2 J9.3 J9.3-2 J10.4 J10.4-2 R1.2 R10.2 R11.1 TP1.P$1 U1.6 U1.8 U2.P$27 U2.P$28 U2.P$29 U2.P$30 U2.P$31 U2.P$32
3.3V1: C3.1 C4.1 D7.C D9.C D10.C J12.1 J14.1 J16.3 J16.3-2 J17.2 J18.4 J18.4-2 R2.2 R17.2 R18.1 TP18.P$1 U3.6 U3.8 U4.P$27 U4.P$28 U4.P$29 U4.P$30 U4.P$31 U4.P$32
3.3V2: C5.1 C6.1 D13.C D15.C D16.C J21.1 J23.1 J25.3 J25.3-2 J26.2 J27.4 J27.4-2 R19.2 R26.2 R27.1 TP37.P$1 U5.6 U5.8 U6.P$27 U6.P$28 U6.P$29 U6.P$30 U6.P$31 U6.P$32
3.3V3: C7.1 C8.1 D19.C D21.C D22.C J30.1 J32.1 J34.3 J34.3-2 J35.2 J36.4 J36.4-2 R28.2 R35.2 R36.1 TP55.P$1 U7.6 U7.8 U8.P$27 U8.P$28 U8.P$29 U8.P$30 U8.P$31 U8.P$32
3.3V4: C9.1 C10.1 D25.C D27.C D28.C J39.1 J41.1 J43.3 J43.3-2 J44.2 J45.4 J45.4-2 R37.2 R44.2 R45.1 TP73.P$1 U9.6 U9.8 U10.P$27 U10.P$28 U10.P$29 U10.P$30 U10.P$31 U10.P$32
3.3V5: C11.1 C12.1 D31.C D33.C D34.C J48.1 J50.1 J52.3 J52.3-2 J53.2 J54.4 J54.4-2 R46.2 R53.2 R54.1 TP91.P$1 U11.6 U11.8 U12.P$27 U12.P$28 U12.P$29 U12.P$30 U12.P$31 U12.P$32
GND: C1.2 C2.2 D2.A D5.A D6.A J4.3 J5.2 J6.3 J7.2 J8.1 J9.4 J9.4-2 J10.5 J10.5-2 J10.6 J10.6-2 R5.1 R6.1 R7.1 TP2.P$1 TP16.P$1 TP17.P$1 U1.1 U1.5 U1.7 U2.P$35 U2.P$36 U2.P$37 U2.P$38 U2.P$39 U2.P$40
GND1: C3.2 C4.2 D8.A D11.A D12.A J12.3 J13.2 J14.3 J15.2 J16.4 J16.4-2 J17.1 J18.5 J18.5-2 J18.6 J18.6-2 R12.1 R13.1 R14.1 TP20.P$1 TP35.P$1 TP36.P$1 U3.1 U3.5 U3.7 U4.P$35 U4.P$36 U4.P$37 U4.P$38 U4.P$39 U4.P$40
GND2: C5.2 C6.2 D14.A D17.A D18.A J21.3 J22.2 J23.3 J24.2 J25.4 J25.4-2 J26.1 J27.5 J27.5-2 J27.6 J27.6-2 R21.1 R22.1 R23.1 TP38.P$1 TP53.P$1 TP54.P$1 U5.1 U5.5 U5.7 U6.P$35 U6.P$36 U6.P$37 U6.P$38 U6.P$39 U6.P$40
GND3: C7.2 C8.2 D20.A D23.A D24.A J30.3 J31.2 J32.3 J33.2 J34.4 J34.4-2 J35.1 J36.5 J36.5-2 J36.6 J36.6-2 R30.1 R31.1 R32.1 TP56.P$1 TP71.P$1 TP72.P$1 U7.1 U7.5 U7.7 U8.P$35 U8.P$36 U8.P$37 U8.P$38 U8.P$39 U8.P$40
GND4: C9.2 C10.2 D26.A D29.A D30.A J39.3 J40.2 J41.3 J42.2 J43.4 J43.4-2 J44.1 J45.5 J45.5-2 J45.6 J45.6-2 R39.1 R40.1 R41.1 TP74.P$1 TP89.P$1 TP90.P$1 U9.1 U9.5 U9.7 U10.P$35 U10.P$36 U10.P$37 U10.P$38 U10.P$39 U10.P$40
GND5: C11.2 C12.2 D32.A D35.A D36.A J48.3 J49.2 J50.3 J51.2 J52.4 J52.4-2 J53.1 J54.5 J54.5-2 J54.6 J54.6-2 R48.1 R49.1 R50.1 TP92.P$1 TP107.P$1 TP108.P$1 U11.1 U11.5 U11.7 U12.P$35 U12.P$36 U12.P$37 U12.P$38 U12.P$39 U12.P$40
N$1: R2.1 U3.2
N$2: R1.1 U1.2
N$3: R19.1 U5.2
N$4: R28.1 U7.2
N$5: R37.1 U9.2
N$6: R46.1 U11.2
RAIN: D1.A D2.C R4.2 TP8.P$1 U2.P$19 U2.P$20 U2.P$21 U2.P$22
RAIN1: D7.A D8.C R3.2 TP24.P$1 U4.P$19 U4.P$20 U4.P$21 U4.P$22
RAIN2: D13.A D14.C R20.2 TP42.P$1 U6.P$19 U6.P$20 U6.P$21 U6.P$22
RAIN3: D19.A D20.C R29.2 TP60.P$1 U8.P$19 U8.P$20 U8.P$21 U8.P$22
RAIN4: D25.A D26.C R38.2 TP78.P$1 U10.P$19 U10.P$20 U10.P$21 U10.P$22
RAIN5: D31.A D32.C R47.2 TP96.P$1 U12.P$19 U12.P$20 U12.P$21 U12.P$22
RAIN_PIN_1: J1.3 R3.1 TP29.P$1
RAIN_PIN_2: J1.4 R12.2 TP30.P$1
RAIN_PIN_3: J2.3 R4.1 TP6.P$1
RAIN_PIN_4: J2.4 R5.2 TP7.P$1
RAIN_PIN_5: J19.3 R20.1 TP47.P$1
RAIN_PIN_6: J19.4 R21.2 TP48.P$1
RAIN_PIN_7: J28.3 R29.1 TP65.P$1
RAIN_PIN_8: J28.4 R30.2 TP66.P$1
RAIN_PIN_9: J37.3 R38.1 TP83.P$1
RAIN_PIN_10: J37.4 R39.2 TP84.P$1
RAIN_PIN_11: J46.3 R47.1 TP101.P$1
RAIN_PIN_12: J46.4 R48.2 TP102.P$1
RXI: J10.3 J10.3-2 U2.P$24
RXI1: J18.3 J18.3-2 U4.P$24
RXI2: J27.3 J27.3-2 U6.P$24
RXI3: J36.3 J36.3-2 U8.P$24
RXI4: J45.3 J45.3-2 U10.P$24
RXI5: J54.3 J54.3-2 U12.P$24
SCL: J8.4 J9.1 J9.1-2 TP4.P$1 U1.4 U2.P$33
SCL1: J16.1 J16.1-2 J17.4 TP22.P$1 U3.4 U4.P$33
SCL2: J25.1 J25.1-2 J26.4 TP40.P$1 U5.4 U6.P$33
SCL3: J34.1 J34.1-2 J35.4 TP58.P$1 U7.4 U8.P$33
SCL4: J43.1 J43.1-2 J44.4 TP76.P$1 U9.4 U10.P$33
SCL5: J52.1 J52.1-2 J53.4 TP94.P$1 U11.4 U12.P$33
SDA: J8.3 J9.2 J9.2-2 TP3.P$1 U1.3 U2.P$34
SDA1: J16.2 J16.2-2 J17.3 TP21.P$1 U3.3 U4.P$34
SDA2: J25.2 J25.2-2 J26.3 TP39.P$1 U5.3 U6.P$34
SDA3: J34.2 J34.2-2 J35.3 TP57.P$1 U7.3 U8.P$34
SDA4: J43.2 J43.2-2 J44.3 TP75.P$1 U9.3 U10.P$34
SDA5: J52.2 J52.2-2 J53.3 TP93.P$1 U11.3 U12.P$34
SOIL_DAT: J5.3 J7.3 TP19.P$1 U2.P$2 U2.P$3 U2.P$4 U2.P$5
SOIL_DAT1: J13.3 J15.3 TP28.P$1 U4.P$2 U4.P$3 U4.P$4 U4.P$5
SOIL_DAT2: J22.3 J24.3 TP46.P$1 U6.P$2 U6.P$3 U6.P$4 U6.P$5
SOIL_DAT3: J31.3 J33.3 TP64.P$1 U8.P$2 U8.P$3 U8.P$4 U8.P$5
SOIL_DAT4: J40.3 J42.3 TP82.P$1 U10.P$2 U10.P$3 U10.P$4 U10.P$5
SOIL_DAT5: J49.3 J51.3 TP100.P$1 U12.P$2 U12.P$3 U12.P$4 U12.P$5
SOIL_PWR: J5.1 J7.1 TP5.P$1 U2.P$26
SOIL_PWR1: J13.1 J15.1 TP23.P$1 U4.P$26
SOIL_PWR2: J22.1 J24.1 TP41.P$1 U6.P$26
SOIL_PWR3: J31.1 J33.1 TP59.P$1 U8.P$26
SOIL_PWR4: J40.1 J42.1 TP77.P$1 U10.P$26
SOIL_PWR5: J49.1 J51.1 TP95.P$1 U12.P$26
TEMP_DAT: J4.2 J6.2 R11.2 TP9.P$1 U2.P$18 U2.P$23
TEMP_DAT1: J12.2 J14.2 R18.2 TP25.P$1 U4.P$18 U4.P$23
TEMP_DAT2: J21.2 J23.2 R27.2 TP43.P$1 U6.P$18 U6.P$23
TEMP_DAT3: J30.2 J32.2 R36.2 TP61.P$1 U8.P$18 U8.P$23
TEMP_DAT4: J39.2 J41.2 R45.2 TP79.P$1 U10.P$18 U10.P$23
TEMP_DAT5: J48.2 J50.2 R54.2 TP97.P$1 U12.P$18 U12.P$23
TXO: J10.2 J10.2-2 U2.P$25
TXO1: J18.2 J18.2-2 U4.P$25
TXO2: J27.2 J27.2-2 U6.P$25
TXO3: J36.2 J36.2-2 U8.P$25
TXO4: J45.2 J45.2-2 U10.P$25
TXO5: J54.2 J54.2-2 U12.P$25
WDIR: D3.A D5.C R8.1 R10.1 TP14.P$1 U2.P$10 U2.P$11 U2.P$12 U2.P$13
WDIR1: D9.A D11.C R15.1 R17.1 TP27.P$1 U4.P$10 U4.P$11 U4.P$12 U4.P$13
WDIR2: D15.A D17.C R24.1 R26.1 TP45.P$1 U6.P$10 U6.P$11 U6.P$12 U6.P$13
WDIR3: D21.A D23.C R33.1 R35.1 TP63.P$1 U8.P$10 U8.P$11 U8.P$12 U8.P$13
WDIR4: D27.A D29.C R42.1 R44.1 TP81.P$1 U10.P$10 U10.P$11 U10.P$12 U10.P$13
WDIR5: D33.A D35.C R51.1 R53.1 TP99.P$1 U12.P$10 U12.P$11 U12.P$12 U12.P$13
WIND_PIN_1: J11.3 R16.2 TP32.P$1
WIND_PIN_2: J3.2 R8.2 TP10.P$1
WIND_PIN_3: J3.3 R9.2 TP11.P$1
WIND_PIN_4: J3.4 R7.2 TP12.P$1
WIND_PIN_5: J3.5 R6.2 TP15.P$1
WIND_PIN_6: J11.5 R13.2 TP34.P$1
WIND_PIN_7: J11.4 R14.2 TP33.P$1
WIND_PIN_8: J11.2 R15.2 TP31.P$1
WIND_PIN_9: J20.3 R25.2 TP50.P$1
WIND_PIN_10: J20.5 R22.2 TP52.P$1
WIND_PIN_11: J20.4 R23.2 TP51.P$1
WIND_PIN_12: J20.2 R24.2 TP49.P$1
WIND_PIN_13: J29.3 R34.2 TP68.P$1
WIND_PIN_14: J29.5 R31.2 TP70.P$1
WIND_PIN_15: J29.4 R32.2 TP69.P$1
WIND_PIN_16: J29.2 R33.2 TP67.P$1
WIND_PIN_17: J38.3 R43.2 TP86.P$1
WIND_PIN_18: J38.5 R40.2 TP88.P$1
WIND_PIN_19: J38.4 R41.2 TP87.P$1
WIND_PIN_20: J38.2 R42.2 TP85.P$1
WIND_PIN_21: J47.3 R52.2 TP104.P$1
WIND_PIN_22: J47.5 R49.2 TP106.P$1
WIND_PIN_23: J47.4 R50.2 TP105.P$1
WIND_PIN_24: J47.2 R51.2 TP103.P$1
WSPEED: D4.A D6.C R9.1 TP13.P$1 U2.P$14
WSPEED1: D10.A D12.C R16.1 TP26.P$1 U4.P$14
WSPEED2: D16.A D18.C R25.1 TP44.P$1 U6.P$14
WSPEED3: D22.A D24.C R34.1 TP62.P$1 U8.P$14
WSPEED4: D28.A D30.C R43.1 TP80.P$1 U10.P$14
WSPEED5: D34.A D36.C R52.1 TP98.P$1 U12.P$14